# Altium PCB SAVE COPY.PcbDoc
Units mm, origin at the board's own origin, x right, y up, seen from the top; angles counter-clockwise.
Board outline 115.2 x 100.2 mm, 2 copper layers (Top Layer, Bottom Layer), stack 0.98 mm thick; 84 components, 44 nets, 255 pads, 83 vias.
Unrouted connection lines stored in the file: 44.
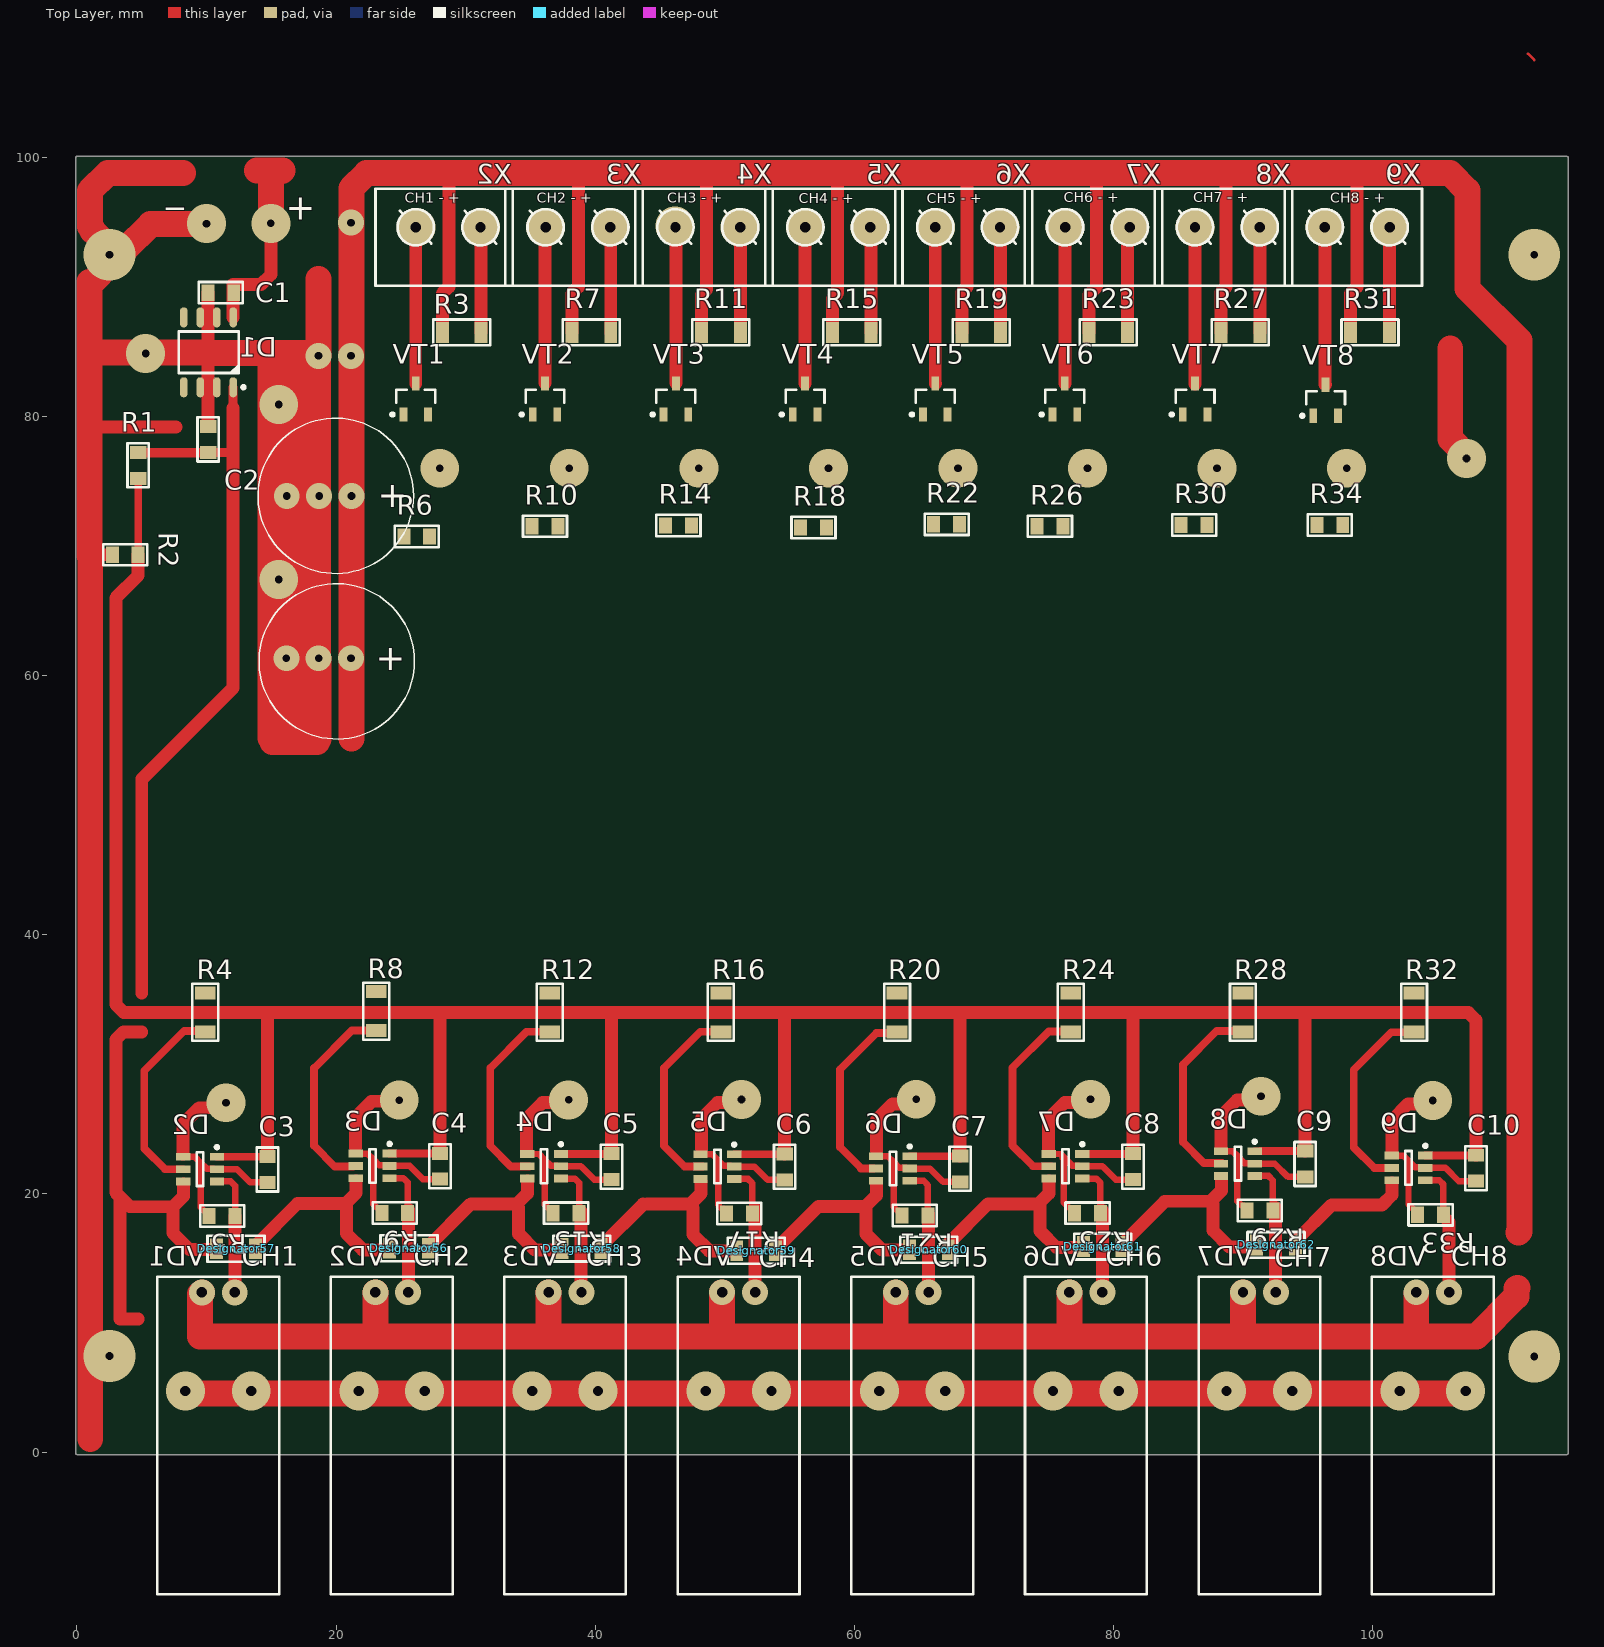
[diagram p0: Top Layer view]
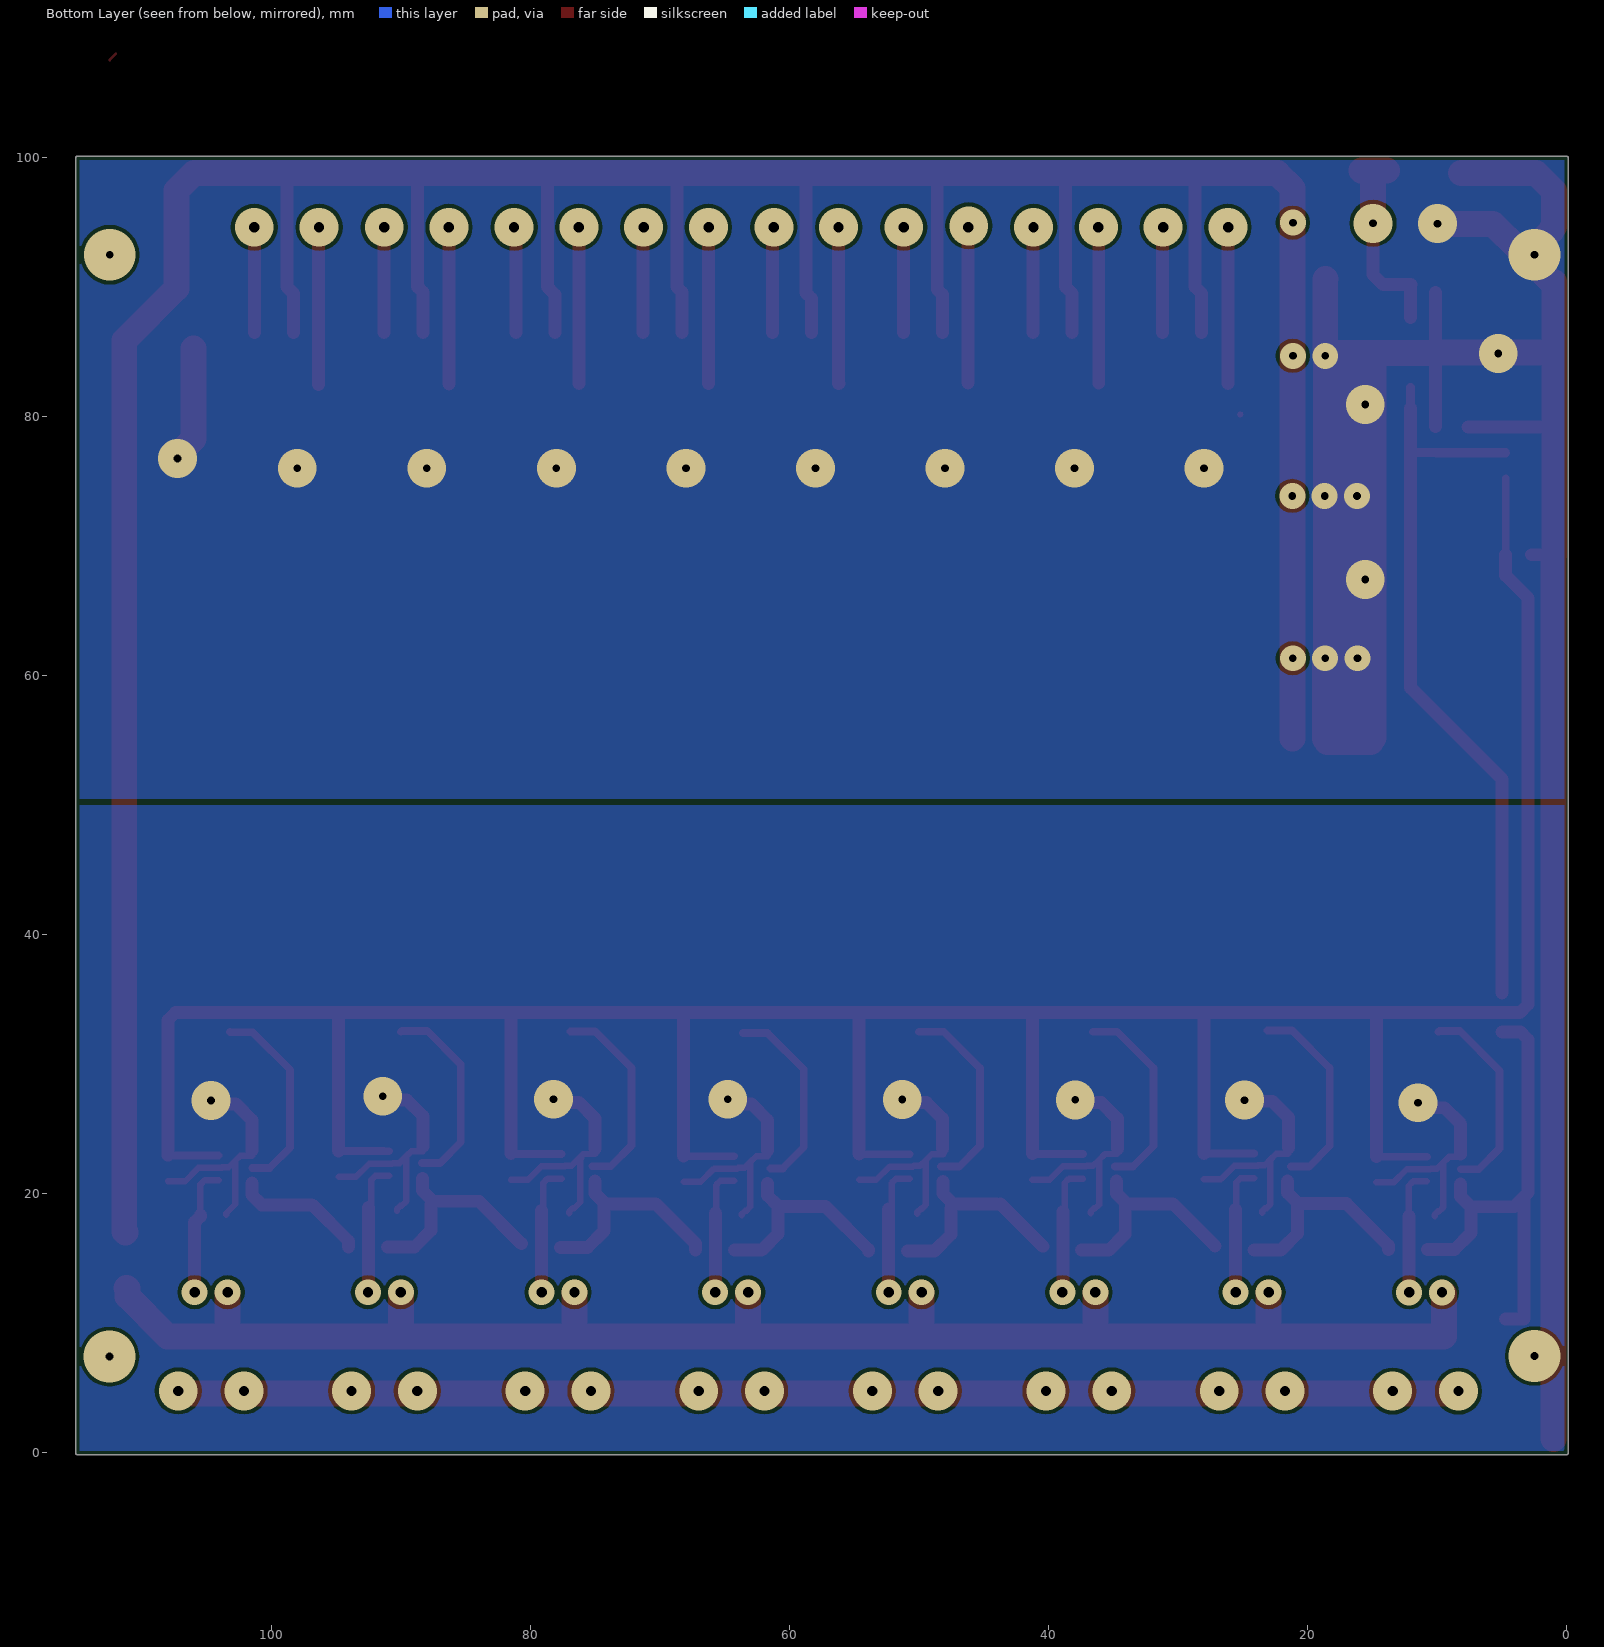
[diagram p1: Bottom Layer view, seen from below]
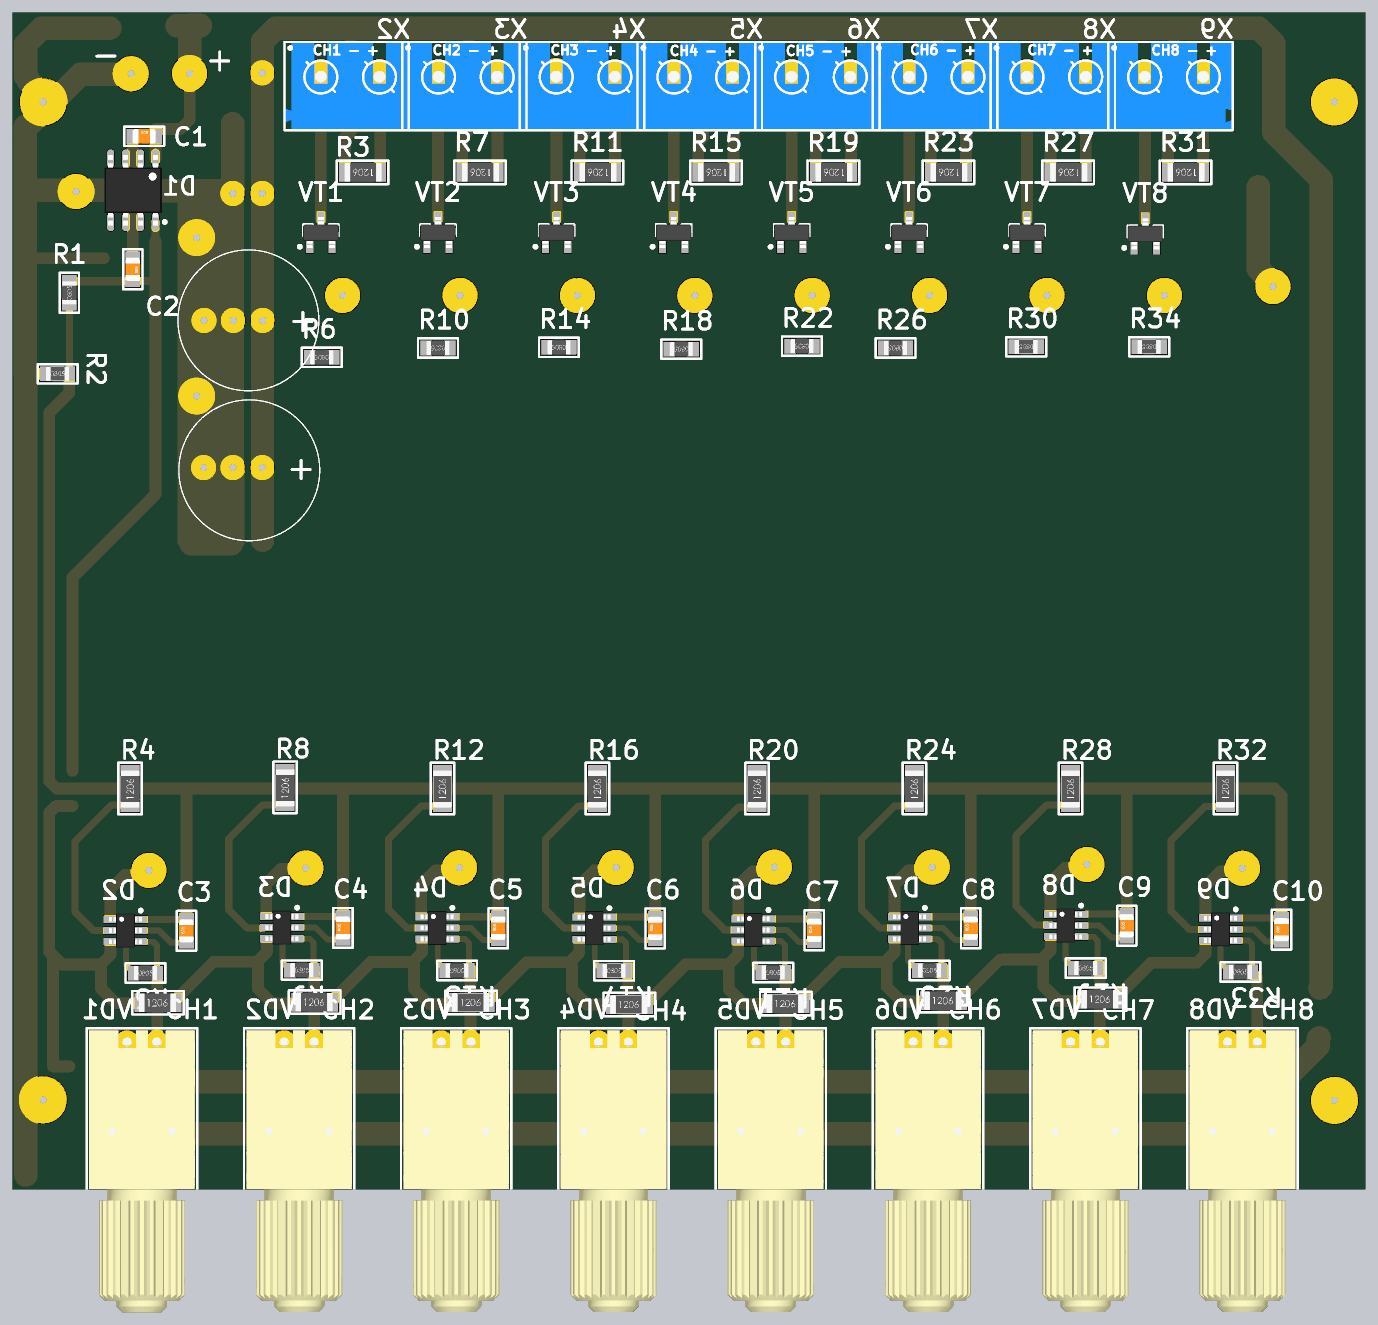
[diagram p2: 3D render of the assembled board from above, using the file's embedded part models]

## Layer stack, top to bottom
Top Solder: solder mask 0.0102, Solder Resist, Dk 3.5
Top Layer: signal copper 0.0356
Dielectric 1: dielectric 0.909, FR-4, Dk 4.8
Bottom Layer: signal copper 0.0356
Bottom Solder: solder mask 0.0102, Solder Resist, Dk 3.5

## Board outline
-0.1,-0.025 ccw(c0,-0.025) 0,-0.125 115,-0.125 ccw(c115,-0.025) 115.032,-0.12 ccw(c115,-0.025) 115.1,-0.025 115.1,99.975 ccw(c115,99.975) 115,100.075 0,100.075 ccw(c0,99.975) -0.1,99.975

## Design rules (kind name [scope] priority, off if disabled: settings)
BoardOutlineClearance [All] p1: gap=0.3 ignorepadtopadclearanceinfootprint=FALSE
Clearance Clearance_MultiLayerPad [OnLayer('Multi-Layer') and IsPad] p1: gap=0.3 ignorepadtopadclearanceinfootprint=FALSE except(0: Arc-Hole Track-Hole SMDPad-Hole THPad-Hole Via-Hole Fill-Hole Poly-Hole Region-Hole Text-Hole)
Clearance Clearance_Polygon [InPolygon] p2: gap=0.2 ignorepadtopadclearanceinfootprint=FALSE except(0: Arc-Hole Track-Hole SMDPad-Hole THPad-Hole Via-Hole Fill-Hole Poly-Hole Region-Hole Text-Hole; 0.3: Arc-Poly Arc-Region Track-Poly Track-Region SMDPad-Poly SMDPad-Region THPad-Poly THPad-Region Via-Poly Via-Region Fill-Poly Fill-Region Poly-Poly Poly-Region Region-Region)
Clearance [All] p3: gap=0.35 ignorepadtopadclearanceinfootprint=FALSE
ComponentClearance [All] p1: gap=-1 collisioncheckmode=3 verticalgap=0.5 showdistances=FALSE
DiffPairsRouting [All] p1: maxlimit=0.4 minlimit=0.2 mostfreqgap=0.2 toplayer_minwidth=0.2 toplayer_maxwidth=0.3 toplayer_prefwidth=0.2 bottomlayer_minwidth=0.2 bottomlayer_maxwidth=0.3 bottomlayer_prefwidth=0.2 maxuncoupledlength=12.7
Height [All] p1: minheight=0 maxheight=50 prefheight=12.7
HoleSize [All] p1: absolutevalues=TRUE maxlimit=10 minlimit=0.2 maxpercent=80.000 minpercent=20.000
HoleToHoleClearance [All] p1: gap=0.3 allowstackedmicrovias=TRUE
MinimumSolderMaskSliver [All] p1: minsoldermaskwidth=0.2
PlaneClearance [All] p1: clearance=0.5
PlaneConnect [All] p1: planeconnectstyle=Relief reliefexpansion=0.5 reliefentries=4 reliefconductorwidth=0.5 reliefairgap=0.3
PolygonConnect PolygonConnect_PadGND [InNet('GND') and IsPad] p1: connectstyle=Relief reliefconductorwidth=0.5 reliefentries=4 polygonreliefangle="90 Angle" airgapwidth=0.3
PolygonConnect PolygonConnect_Via [IsVia] p2: connectstyle=Direct reliefconductorwidth=0.254 reliefentries=4 polygonreliefangle="90 Angle" airgapwidth=0.254
PolygonConnect [All] p3: connectstyle=Relief reliefconductorwidth=0.5 reliefentries=4 polygonreliefangle="90 Angle" airgapwidth=0.3
RoomDefinition SCH1 [InComponentClass('SCH1')] p1: confinementstyle=ConfineIn formatcopy=TRUE lockcomponents=FALSE outline 3.925,13.475 15.75,13.475 15.75,57.975 3.925,57.975
RoomDefinition SCH8 [InComponentClass('SCH8')] p2: confinementstyle=ConfineIn formatcopy=TRUE lockcomponents=FALSE outline 97.2,13.575 109.025,13.575 109.025,58.075 97.2,58.075
RoomDefinition SCH4 [InComponentClass('SCH4')] p3: confinementstyle=ConfineIn formatcopy=TRUE lockcomponents=FALSE outline 43.85,13.675 55.675,13.675 55.675,58.175 43.85,58.175
RoomDefinition SCH2 [InComponentClass('SCH2')] p4: confinementstyle=ConfineIn formatcopy=TRUE lockcomponents=FALSE outline 17.25,13.725 29.075,13.725 29.075,58.225 17.25,58.225
RoomDefinition SCH3 [InComponentClass('SCH3')] p5: confinementstyle=ConfineIn formatcopy=TRUE lockcomponents=FALSE outline 30.475,13.7 42.3,13.7 42.3,58.2 30.475,58.2
RoomDefinition SCH5 [InComponentClass('SCH5')] p6: confinementstyle=ConfineIn formatcopy=TRUE lockcomponents=FALSE outline 57.398,13.525 69.223,13.525 69.223,58.025 57.398,58.025
RoomDefinition SCH6 [InComponentClass('SCH6')] p7: confinementstyle=ConfineIn formatcopy=TRUE lockcomponents=FALSE outline 70.725,13.7 82.55,13.7 82.55,58.2 70.725,58.2
RoomDefinition SCH7 [InComponentClass('SCH7')] p8: confinementstyle=ConfineIn formatcopy=TRUE lockcomponents=FALSE outline 84.025,13.9 95.85,13.9 95.85,58.4 84.025,58.4
RoomDefinition SUP [InComponentClass('SUP')] p9: confinementstyle=ConfineIn formatcopy=TRUE lockcomponents=FALSE outline 23.9,74.675 23.9,100 5.625,100 5.625,74.675
RoomDefinition REF [InComponentClass('REF')] p10: confinementstyle=ConfineIn formatcopy=TRUE lockcomponents=FALSE outline 0.95,80.899 0.95,66.899 6.825,66.899 6.825,80.899
RoutingTopology [All] p1: topology=Vertical
RoutingVias [All] p1: holewidth=0.2 width=0.4 viastyle="Through Hole" minholewidth=0.2 minwidth=0.4 maxholewidth=0.5 maxwidth=1.2
SilkToSolderMaskClearance [IsPad] p1: minsilkscreentomaskgap=0.2 clearancetoexposedcopper=TRUE
SolderMaskExpansion [All] p1: expansion=0.075 istentingtop=FALSE
Width [All] p1: maxlimit=10 minlimit=0.2 preferedwidth=0.2
20 further rules are at their usual default settings.

## Classes and differential pairs
channel class Sch: SCH1 SCH2 SCH3 SCH4 SCH5 SCH6 SCH7 SCH8
component class SUP: C1 C2 D1
component class SCH8: C10 D9 R31 R32 R33 R34 VD8 VT8 X9
component class SCH7: C9 D8 R27 R28 R29 R30 VD7 VT7 X8
component class SCH6: C8 D7 R23 R24 R25 R26 VD6 VT6 X7
component class SCH5: C7 D6 R19 R20 R21 R22 VD5 VT5 X6
component class SCH4: C6 D5 R15 R16 R17 R18 VD4 VT4 X5
component class SCH3: C5 D4 R11 R12 R13 R14 VD3 VT3 X4
component class SCH2: C4 D3 R7 R8 R9 R10 VD2 VT2 X3
component class SCH1: C3 D2 R3 R4 R5 R6 VD1 VT1 X2
component class REF: R1 R2

## Components (designator, comment, footprint, x,y, rotation, side; value= is the part's Value field where it differs from the comment)
C1 "Ceramic capacitor, 1μF, X7R, ±10%, 16V, 0805, -55...+125°C" "CAP: 0805" 11.1,89.55 r0 top value=1μF (schematic designator C2)
C2 "Ceramic capacitor, 0.1μF, X7R, ±10%, 16V, 0805, -55...+125°C" "CAP: 0805" 10.125,78.225 r270 top value=0.1μF (schematic designator C3)
C3 "Ceramic capacitor, 1μF, X7R, ±10%, 16V, 0805, -55...+125°C" "CAP: 0805" 14.7,21.875 r90 top value=1μF (schematic designator C1)
C4 "Ceramic capacitor, 1μF, X7R, ±10%, 16V, 0805, -55...+125°C" "CAP: 0805" 28.025,22.125 r90 top value=1μF (schematic designator C1)
C5 "Ceramic capacitor, 1μF, X7R, ±10%, 16V, 0805, -55...+125°C" "CAP: 0805" 41.25,22.1 r90 top value=1μF (schematic designator C1)
C6 "Ceramic capacitor, 1μF, X7R, ±10%, 16V, 0805, -55...+125°C" "CAP: 0805" 54.625,22.075 r90 top value=1μF (schematic designator C1)
C7 "Ceramic capacitor, 1μF, X7R, ±10%, 16V, 0805, -55...+125°C" "CAP: 0805" 68.173,21.925 r90 top value=1μF (schematic designator C1)
C8 "Ceramic capacitor, 1μF, X7R, ±10%, 16V, 0805, -55...+125°C" "CAP: 0805" 81.5,22.1 r90 top value=1μF (schematic designator C1)
C9 "Ceramic capacitor, 1μF, X7R, ±10%, 16V, 0805, -55...+125°C" "CAP: 0805" 94.8,22.3 r90 top value=1μF (schematic designator C1)
C10 "Ceramic capacitor, 1μF, X7R, ±10%, 16V, 0805, -55...+125°C" "CAP: 0805" 107.975,21.975 r90 top value=1μF (schematic designator C1)
D1 "L78L05ABD" 8-SOIC 10.15,84.95 r90 top (schematic designator D2)
D2 "TLV3501" SOT23-6 9.5,21.9 r180 top (schematic designator D1)
D3 "TLV3501" SOT23-6 22.825,22.15 r180 top (schematic designator D1)
D4 "TLV3501" SOT23-6 36.05,22.125 r180 top (schematic designator D1)
D5 "TLV3501" SOT23-6 49.425,22.1 r180 top (schematic designator D1)
D6 "TLV3501" SOT23-6 62.973,21.95 r180 top (schematic designator D1)
D7 "TLV3501" SOT23-6 76.3,22.125 r180 top (schematic designator D1)
D8 "TLV3501" SOT23-6 89.6,22.325 r180 top (schematic designator D1)
D9 "TLV3501" SOT23-6 102.775,22 r180 top (schematic designator D1)
Designator56 "Comment" "RES: 1206" 25.625,15.8 r0 top
Designator57 "Comment" "RES: 1206" 12.275,15.75 r0 top
Designator58 "Comment" "RES: 1206" 38.95,15.775 r0 top
Designator59 "Comment" "RES: 1206" 52.425,15.6 r0 top
Designator60 "Comment" "RES: 1206" 65.75,15.675 r0 top
Designator61 "Comment" "RES: 1206" 79.175,15.925 r0 top
Designator62 "Comment" "RES: 1206" 92.55,16.05 r0 top
R1 "Resistor film, 27k, ±5%, 0805, 0.125W, -55...+125°C" "RES: 0805" 4.725,76.224 r90 top value=27k (schematic designator R5)
R2 "Resistor film, 1k, ±5%, 0805, 0.125W, -55...+125°C" "RES: 0805" 3.725,69.325 r0 top value=1k (schematic designator R6)
R3 "Resistor film, 100R, ±5%, 1206, 0.25W, -55...+125°C" "RES: 1206" 29.7,86.481 r180 top value=100R (schematic designator R1)
R4 "Resistor film, 100R, ±5%, 1206, 0.25W, -55...+125°C" "RES: 1206" 9.9,34 r90 top value=100R (schematic designator R2)
R5 "Resistor film, 100R, ±5%, 0805, 0.125W, -55...+125°C" "RES: 0805" 11.2,18.275 r0 top value=100R (schematic designator R3)
R6 "Resistor film, 100R, ±5%, 0805, 0.125W, -55...+125°C" "RES: 0805" 26.225,70.725 r180 top value=100R (schematic designator R4)
R7 "Resistor film, 100R, ±5%, 1206, 0.25W, -55...+125°C" "RES: 1206" 39.7,86.481 r180 top value=100R (schematic designator R1)
R8 "Resistor film, 100R, ±5%, 1206, 0.25W, -55...+125°C" "RES: 1206" 23.1,34.1 r90 top value=100R (schematic designator R2)
R9 "Resistor film, 100R, ±5%, 0805, 0.125W, -55...+125°C" "RES: 0805" 24.525,18.525 r0 top value=100R (schematic designator R3)
R10 "Resistor film, 100R, ±5%, 0805, 0.125W, -55...+125°C" "RES: 0805" 36.125,71.525 r180 top value=100R (schematic designator R4)
R11 "Resistor film, 100R, ±5%, 1206, 0.25W, -55...+125°C" "RES: 1206" 49.7,86.481 r180 top value=100R (schematic designator R1)
R12 "Resistor film, 100R, ±5%, 1206, 0.25W, -55...+125°C" "RES: 1206" 36.5,34 r90 top value=100R (schematic designator R2)
R13 "Resistor film, 100R, ±5%, 0805, 0.125W, -55...+125°C" "RES: 0805" 37.75,18.5 r0 top value=100R (schematic designator R3)
R14 "Resistor film, 100R, ±5%, 0805, 0.125W, -55...+125°C" "RES: 0805" 46.425,71.575 r180 top value=100R (schematic designator R4)
R15 "Resistor film, 100R, ±5%, 1206, 0.25W, -55...+125°C" "RES: 1206" 59.8,86.481 r180 top value=100R (schematic designator R1)
R16 "Resistor film, 100R, ±5%, 1206, 0.25W, -55...+125°C" "RES: 1206" 49.7,34 r90 top value=100R (schematic designator R2)
R17 "Resistor film, 100R, ±5%, 0805, 0.125W, -55...+125°C" "RES: 0805" 51.125,18.475 r0 top value=100R (schematic designator R3)
R18 "Resistor film, 100R, ±5%, 0805, 0.125W, -55...+125°C" "RES: 0805" 56.85,71.425 r180 top value=100R (schematic designator R4)
R19 "Resistor film, 100R, ±5%, 1206, 0.25W, -55...+125°C" "RES: 1206" 69.8,86.481 r180 top value=100R (schematic designator R1)
R20 "Resistor film, 100R, ±5%, 1206, 0.25W, -55...+125°C" "RES: 1206" 63.3,34 r90 top value=100R (schematic designator R2)
R21 "Resistor film, 100R, ±5%, 0805, 0.125W, -55...+125°C" "RES: 0805" 64.673,18.325 r0 top value=100R (schematic designator R3)
R22 "Resistor film, 100R, ±5%, 0805, 0.125W, -55...+125°C" "RES: 0805" 67.125,71.675 r180 top value=100R (schematic designator R4)
R23 "Resistor film, 100R, ±5%, 1206, 0.25W, -55...+125°C" "RES: 1206" 79.6,86.481 r180 top value=100R (schematic designator R1)
R24 "Resistor film, 100R, ±5%, 1206, 0.25W, -55...+125°C" "RES: 1206" 76.7,34 r90 top value=100R (schematic designator R2)
R25 "Resistor film, 100R, ±5%, 0805, 0.125W, -55...+125°C" "RES: 0805" 78,18.5 r0 top value=100R (schematic designator R3)
R26 "Resistor film, 100R, ±5%, 0805, 0.125W, -55...+125°C" "RES: 0805" 75.1,71.525 r180 top value=100R (schematic designator R4)
R27 "Resistor film, 100R, ±5%, 1206, 0.25W, -55...+125°C" "RES: 1206" 89.8,86.481 r180 top value=100R (schematic designator R1)
R28 "Resistor film, 100R, ±5%, 1206, 0.25W, -55...+125°C" "RES: 1206" 90,34 r90 top value=100R (schematic designator R2)
R29 "Resistor film, 100R, ±5%, 0805, 0.125W, -55...+125°C" "RES: 0805" 91.3,18.7 r0 top value=100R (schematic designator R3)
R30 "Resistor film, 100R, ±5%, 0805, 0.125W, -55...+125°C" "RES: 0805" 86.225,71.625 r180 top value=100R (schematic designator R4)
R31 "Resistor film, 100R, ±5%, 1206, 0.25W, -55...+125°C" "RES: 1206" 99.8,86.481 r180 top value=100R (schematic designator R1)
R32 "Resistor film, 100R, ±5%, 1206, 0.25W, -55...+125°C" "RES: 1206" 103.2,34 r90 top value=100R (schematic designator R2)
R33 "Resistor film, 100R, ±5%, 0805, 0.125W, -55...+125°C" "RES: 0805" 104.475,18.375 r0 top value=100R (schematic designator R3)
R34 "Resistor film, 100R, ±5%, 0805, 0.125W, -55...+125°C" "RES: 0805" 96.7,71.625 r180 top value=100R (schematic designator R4)
VD1 "SHF250" "LED: SFH757" 10.91,8.585 r180 top
VD2 "SHF250" "LED: SFH757" 24.295,8.59 r180 top (schematic designator VD1)
VD3 "SHF250" "LED: SFH757" 37.67,8.59 r180 top (schematic designator VD1)
VD4 "SHF250" "LED: SFH757" 51.07,8.59 r180 top (schematic designator VD1)
VD5 "SHF250" "LED: SFH757" 64.47,8.59 r180 top (schematic designator VD1)
VD6 "SHF250" "LED: SFH757" 77.87,8.59 r180 top (schematic designator VD1)
VD7 "SHF250" "LED: SFH757" 91.27,8.59 r180 top (schematic designator VD1)
VD8 "SHF250" "LED: SFH757" 104.645,8.59 r180 top (schematic designator VD1)
VT1 "MOSFET N-channel transistor, 80V, 7A, 9.1nC, 2.5W, 34mOhm, 756pF, 8-TDSON, -55...+150°C" SOT23 26.15,81.35 r90 top
VT2 "MOSFET N-channel transistor, 80V, 7A, 9.1nC, 2.5W, 34mOhm, 756pF, 8-TDSON, -55...+150°C" SOT23 36.125,81.35 r90 top (schematic designator VT1)
VT3 "MOSFET N-channel transistor, 80V, 7A, 9.1nC, 2.5W, 34mOhm, 756pF, 8-TDSON, -55...+150°C" SOT23 46.225,81.35 r90 top (schematic designator VT1)
VT4 "MOSFET N-channel transistor, 80V, 7A, 9.1nC, 2.5W, 34mOhm, 756pF, 8-TDSON, -55...+150°C" SOT23 56.2,81.35 r90 top (schematic designator VT1)
VT5 "MOSFET N-channel transistor, 80V, 7A, 9.1nC, 2.5W, 34mOhm, 756pF, 8-TDSON, -55...+150°C" SOT23 66.25,81.35 r90 top (schematic designator VT1)
VT6 "MOSFET N-channel transistor, 80V, 7A, 9.1nC, 2.5W, 34mOhm, 756pF, 8-TDSON, -55...+150°C" SOT23 76.25,81.35 r90 top (schematic designator VT1)
VT7 "MOSFET N-channel transistor, 80V, 7A, 9.1nC, 2.5W, 34mOhm, 756pF, 8-TDSON, -55...+150°C" SOT23 86.3,81.35 r90 top (schematic designator VT1)
VT8 "MOSFET N-channel transistor, 80V, 7A, 9.1nC, 2.5W, 34mOhm, 756pF, 8-TDSON, -55...+150°C" SOT23 96.375,81.25 r90 top (schematic designator VT1)
X2 "Terminal connector, 2pin, 3.5mm, 300VAC, 10A" "CON: KF301-5.0-2P" 28.418,93.781 r0 top (schematic designator X1)
X3 "Terminal connector, 2pin, 3.5mm, 300VAC, 10A" "CON: KF301-5.0-2P" 38.443,93.781 r0 top (schematic designator X1)
X4 "Terminal connector, 2pin, 3.5mm, 300VAC, 10A" "CON: KF301-5.0-2P" 48.468,93.781 r0 top (schematic designator X1)
X5 "Terminal connector, 2pin, 3.5mm, 300VAC, 10A" "CON: KF301-5.0-2P" 58.493,93.781 r0 top (schematic designator X1)
X6 "Terminal connector, 2pin, 3.5mm, 300VAC, 10A" "CON: KF301-5.0-2P" 68.518,93.781 r0 top (schematic designator X1)
X7 "Terminal connector, 2pin, 3.5mm, 300VAC, 10A" "CON: KF301-5.0-2P" 78.543,93.781 r0 top (schematic designator X1)
X8 "Terminal connector, 2pin, 3.5mm, 300VAC, 10A" "CON: KF301-5.0-2P" 88.568,93.781 r0 top (schematic designator X1)
X9 "Terminal connector, 2pin, 3.5mm, 300VAC, 10A" "CON: KF301-5.0-2P" 98.593,93.781 r0 top (schematic designator X1)

## Footprints (in the part's own frame and the unit in brackets; to place one, negate y for a bottom-side part, rotate by r counter-clockwise, add the part's x,y. Pads: shape width x height; smd on the part's side, far side on the other; paste and mask are expansions set on the pad)
8-SOIC [mm] "pitch 1.27 mm"
  rrect100% 1.55x0.6 smd: 1(-2.7,-1.905) 2(-2.7,-0.635) 3(-2.7,0.635) 4(-2.7,1.905) 5(2.7,1.905) 6(2.7,0.635) 7(2.7,-0.635) 8(2.7,-1.905)
  round 0.7 on Mech1: 28(-2.395,-1.8)
  silkscreen extent -2.82,-2.83 1.61,2.3, body extent -3,-2.45 3,2.45, height 1.75
"CAP: 0805" [mm]
  rect 1x1.25 smd: 1(-1,0) 2(1,0)
  silkscreen extent -1.7,-0.82 1.7,0.82, body extent -1,-0.62 1,0.63, height 0.78
"CON: KF301-5.0-2P" [mm]
  round 1.524 hole 0.8: 1(2.725,0.825) 2(-2.275,0.825)
  round 0.5 on Top Overlay: ""(-4.875,3.3)
  silkscreen extent -5.38,-3.7 5.23,3.8, body extent -5.37,-3.75 5.23,3.85, height 3
"LED: SFH757" [mil]
  round 60 hole 31.5: 1(-50,-150) 2(50,-150) 3(-100,150) 4(100,150)
  silkscreen extent -185,-197 185,768, body extent -177,-189 177,756, height 177
"RES: 0805" [mm]
  rect 1x1.25 smd: 1(-1,0) 2(1,0)
  silkscreen extent -1.7,-0.82 1.7,0.82, body extent -1,-0.6 1,0.6, height 0.44
"RES: 1206" [mm]
  rect 1x1.6 smd: 1(-1.5,0) 2(1.5,0)
  silkscreen extent -2.2,-1 2.2,1, body extent -1.65,-0.8 1.55,0.8, height 0.47
SOT23 [mm]
  rect 1.1x0.6 smd: 1(-1.2,0.95) 2(-1.2,-0.95) 3(1.2,0)
  round 0.5 on Mech1: ""(-0.9,1.1)
  silkscreen extent -1.32,-1.5 0.7,1.92, body extent -1.32,-1.52 1.32,1.52, height 1.12
SOT23-6 [mm] "pitch 0.95 mm"
  rect 1.1x0.6 smd: 1(-1.3,-0.95) 2(-1.3,0) 3(-1.3,0.95) 4(1.3,0.95) 5(1.3,0) 6(1.3,-0.95)
  round 0.5 on Mech1: ""(-1,-1.1)
  silkscreen extent -1.43,-1.82 0.25,1.3, body extent -1.4,-1.45 1.4,1.45, height 1.45

## Part data
C1 C2 C3 C4 C5 C6 C7 C8 C9 C10: library part Ceramic_0805, Manufacturer=Yageo, Package=0805, PartNumber=CC0805KRX7R7BB104, Temperature=-55...+125°C, Tolerance=±10%, TypeCapacitor="Ceramic capacitor", TypeDielectric=X7R, Voltage=16V, HelpURL=https://www.digikey.com/product-detail/en/yageo/CC0805KRX7R7BB104/311-1142-1-ND/303052
  C1 C3 C4 C5 C6 C7 C8 C9 C10: ValueManufacturerPartNumber="Ceramic capacitor, 1μF, X7R, ±10%, 16V, 0805, -55...+125°C"
  C2: ValueManufacturerPartNumber="Ceramic capacitor, 0.1μF, X7R, ±10%, 16V, 0805, -55...+125°C"
R1 R2 R5 R6 R9 R10 R13 R14 R17 R18 R21 R22 R25 R26 R29 R30 R33 R34: library part Resistor_0805, Manufacturer=Yageo, Package=0805, PartNumber=RC0805JR-07100RL, Power=0.125W, Temperature=-55...+125°C, Tolerance=±5%, TypeResistor="Resistor film", HelpURL=https://www.digikey.com/product-detail/en/yageo/RC0805JR-07100RL/311-100ARCT-ND/731185
  R1: ValueManufacturerPartNumber="Resistor film, 27k, ±5%, 0805, 0.125W, -55...+125°C"
  R2: ValueManufacturerPartNumber="Resistor film, 1k, ±5%, 0805, 0.125W, -55...+125°C"
  R5 R6 R9 R10 R13 R14 R17 R18 R21 R22 R25 R26 R29 R30 R33 R34: ValueManufacturerPartNumber="Resistor film, 100R, ±5%, 0805, 0.125W, -55...+125°C"
R3 R4 R7 R8 R11 R12 R15 R16 R19 R20 R23 R24 R27 R28 R31 R32: library part Resistor_1206, Manufacturer=Yageo, Package=1206, PartNumber=RC1206JR-07100RL, Power=0.25W, Temperature=-55...+125°C, Tolerance=±5%, TypeResistor="Resistor film", HelpURL=https://www.digikey.com/product-detail/en/yageo/RC1206JR-07100RL/311-100ERCT-ND/732153, ValueManufacturerPartNumber="Resistor film, 100R, ±5%, 1206, 0.25W, -55...+125°C"
VT1 VT2 VT3 VT4 VT5 VT6 VT7 VT8: library part MOSFET_N_132, CurrentDS=7A, InputCapacitor=756pF, Manufacturer="Infineon Technologies", MaxPower=2.5W, Package=8-TDSON, PartNumber=IRLM2803, Temperature=-55...+150°C, VoltageDS=80V, GateCharge=9.1nC, HelpURL=https://www.digikey.com/product-detail/en/infineon-technologies/BSC340N08NS3GATMA1/BSC340N08NS3GATMA1TR-ND/2080655, RDS=34mOhm, TypeTransistor="MOSFET N-channel transistor", ValueManufacturerPartNumber="MOSFET N-channel transistor, 80V, 7A, 9.1nC, 2.5W, 34mOhm, 756pF, 8-TDSON, -55...+150°C"
X2 X3 X4 X5 X6 X7 X8 X9: library part Connector_terminal_2pin, CurrentMax=10A, Manufacturer=Degson, PartNumber=DG350-3.5-02P-14, VoltageMax=300VAC, CommentText="\"Разъем\"", HelpURL=https://www.chipdip.ru/product/dg350-3.5-02p-12, Multichannel=2pin, Pitch=3.5mm, TypeConnector="Terminal connector", ValueManufacturerPartNumber="Terminal connector, 2pin, 3.5mm, 300VAC, 10A"

## Via types
v1: diameter 3, hole 0.6, Top Layer to Bottom Layer, 54 vias
v2: diameter 2, hole 0.6, Top Layer to Bottom Layer, 25 vias
v3: diameter 4, hole 0.6, Top Layer to Bottom Layer, 4 vias

## Nets (pads, with @x,y where several pads share a name; then routed paths per layer and width w, separated by ;. In a path a pad name is that pad's centre, name@x,y a point inside that pad or via, vN(x,y) a via of type N, cw(c..) or ccw(c..) an arc to the next point about the centre after c; other vN are vias at no path point)
GND: C1.1 C2.1 C3.1 C4.1 C5.1 C6.1 C7.1 C8.1 C9.1 C10.1 D1.2 D1.3 D1.6 D1.7 D2.2 D2.6 D3.2 D3.6 D4.2 D4.6 D5.2 D5.6 D6.2 D6.6 D7.2 D7.6 D8.2 D8.6 D9.2 D9.6 R2.1 R5.1 R6.1 R9.1 R10.1 R13.1 R14.1 R17.1 R18.1 R21.1 R22.1 R25.1 R26.1 R29.1 R30.1 R33.1 R34.1 VT1.2 VT2.2 VT3.2 VT4.2 VT5.2 VT6.2 VT7.2 VT8.2 | length 325.4
  Top Layer w0.5: D2.6 8.205,22.845 9.106,22.845 9.554,22.398 ; R5.1 10.2,18.4 9.95,18.65 9.847,18.65 9.554,18.943 9.554,22.398 ; C3.1 13.375,20.875 12.35,21.9 10.55,21.9 10.5,21.95 10.254,21.95 10.001,21.95 9.554,22.398 ; D3.6 21.53,23.095 22.431,23.095 22.879,22.648 ; R9.1 23.525,18.65 23.275,18.9 23.172,18.9 22.879,19.193 22.879,22.648 ; C4.1 26.7,21.125 25.675,22.15 23.875,22.15 23.825,22.2 23.579,22.2 23.326,22.2 22.879,22.648 ; D4.6 34.755,23.07 35.656,23.07 36.104,22.623 ; R13.1 36.75,18.625 36.5,18.875 36.397,18.875 36.104,19.168 36.104,22.623 ; C5.1 39.925,21.1 38.9,22.125 37.1,22.125 37.05,22.175 36.804,22.175 36.551,22.175 36.104,22.623 ; D5.6 48.13,23.045 49.031,23.045 49.479,22.598 ; R17.1 50.125,18.6 49.875,18.85 49.772,18.85 49.479,19.143 49.479,22.598 ; C6.1 53.3,21.075 52.275,22.1 50.475,22.1 50.425,22.15 50.179,22.15 49.926,22.15 49.479,22.598 ; D6.6 61.678,22.895 62.579,22.895 63.027,22.448 ; R21.1 63.673,18.45 63.423,18.7 63.32,18.7 63.027,18.993 63.027,22.448 ; C7.1 66.848,20.925 65.823,21.95 64.023,21.95 63.973,22 63.727,22 63.475,22 63.027,22.448 ; D7.6 75.005,23.07 75.906,23.07 76.801,22.175 77.054,22.175 77.3,22.175 77.35,22.125 79.15,22.125 80.175,21.1 C8.1 ; 76.088,22.889 76.088,22.736 76.15,22.674 76.15,19.35 76.625,18.875 76.75,18.875 77,18.625 R25.1 ; D8.6 88.305,23.27 89.206,23.27 89.568,22.908 ; R29.1 90.3,18.825 90.05,19.075 89.925,19.075 89.568,19.432 89.568,22.908 ; C9.1 93.475,21.3 92.45,22.325 90.65,22.325 90.6,22.375 90.354,22.375 90.101,22.375 89.568,22.908 ; D9.6 101.48,22.945 102.381,22.945 102.775,22.551 ; R33.1 103.475,18.5 102.775,19.2 102.775,22.551 ; C10.1 106.65,20.975 105.625,22 103.825,22 103.775,22.05 103.529,22.05 103.276,22.05 102.775,22.551
  Top Layer w1: 0.975,69.275 1.025,69.325 R2.1 ; 0.975,79.3 1.1,79.175 7.65,79.175 ; D2.6@8.2,23.05 8.2,25.4 9.442,26.642 11.117,26.642 v1(11.5,27.025) ; C2.1 10.125,84.9 C1.1@10.125,89.55 ; 21.5,23.55 21.5,25.9 22.742,27.142 v1@24.417,27.142 ; 34.7,23.45 34.7,25.8 35.942,27.042 v1@37.617,27.042 ; 48.2,23.45 48.2,25.8 49.442,27.042 v1@51.117,27.042 ; 61.7,23.35 61.7,25.7 62.942,26.942 v1@64.617,26.942 ; 75,23.45 75,25.8 76.242,27.042 v1@77.917,27.042 ; 88.3,23.65 88.3,26 89.542,27.242 v1@91.217,27.242 ; 101.5,23.35 101.5,25.7 102.742,26.942 v1@104.417,26.942
  Top Layer w2: 0.975,69.275 0.975,79.3 0.975,85.95 ; 0.975,84.925 0.975,85.95 ; 0.975,90.4 0.975,85.95 ; 1.025,1.075 1.025,69.325 ; 1.2,90.4 2.5,91.7 v3(2.5,92.475) ; 8.175,98.775 2.371,98.775 1,97.404 1,94.647 1.2,94.447 1.2,94.317 2.5,93.016 v3(2.5,92.475) ; v1@9.843,94.631 9.789,94.631 9.57,94.85 5.687,94.85 3.694,92.858 2.883,92.858 v3(2.5,92.475) ; v1@9.951,94.837 v1@10.005,94.783 ; 10.125,84.9 18.43,84.9 v2(18.649,84.682) 18.649,90.601 18.625,90.625 ; 14.925,55.175 14.925,84.65 ; 18.656,55.106 v2(18.656,61.334)
  other v1: 104.65,27.2 24.875,27.225 37.95,27.25 51.3,27.275 64.775,27.3 78.225,27.3 91.4,27.525 15.568,67.424 28,76 38,76 48,76 58,76 68,76 78,76 88,76 98,76 15.568,80.924 5.3,84.85 9.988,94.88
  other v2: 16.156,61.334 16.194,73.866 18.694,73.866
NetC2_2: C2.2 D1.1 D2.4 D3.4 D4.4 D5.4 D6.4 D7.4 D8.4 D9.4 Designator56.1 Designator56.2 Designator57.1 Designator57.2 Designator58.1 Designator58.2 Designator59.1 Designator59.2 Designator60.1 Designator60.2 Designator61.1 Designator61.2 Designator62.1 Designator62.2 R1.2 | length 191.4
  Top Layer w0.5: R1.2 R1.2@4.75,77.2 ; 7.625,77.2 7.65,77.175 7.675,77.2 ; C2.2@10.1,77.2 C2.2
  Top Layer w0.7: R1.2@4.75,77.2 7.625,77.2 ; 7.675,77.2 C2.2@10.1,77.2 ; C2.2 11.525,77.225 ; 12.055,80.65 D1.1
  Top Layer w1: 5,32.5 3.586,32.5 3,31.914 3,20.086 4.086,19 7.414,19 ; 5,35.5 5,52 12.055,59.055 12.055,80.65 ; D2.4@8.225,20.75 8.225,19.811 7.414,19 ; Designator57.1@10.775,15.7 8.675,15.7 7.414,16.961 7.414,19 ; Designator57.2@13.775,15.7 13.775,16 17.025,19.25 20.739,19.25 21.55,20.061 D3.4@21.55,21 ; 20.789,18.975 20.789,16.936 22.05,15.675 Designator56.1@24.15,15.675 ; Designator56.2@27.15,15.975 30.4,19.225 ; 30.636,19.225 33.964,19.225 34.775,20.036 D4.4@34.775,20.975 ; 34.089,18.95 34.089,16.911 35.35,15.65 Designator58.1@37.45,15.65 ; Designator58.2@40.45,15.95 43.7,19.2 ; 44.011,19.2 47.339,19.2 48.15,20.011 D5.4@48.15,20.95 ; 47.539,18.9 47.539,16.861 48.8,15.6 Designator59.1@50.9,15.6 ; Designator59.2@53.9,15.6 53.9,15.7 57.233,19.033 57.721,19.033 57.738,19.029 60.867,19.029 61.698,19.861 D6.4@61.698,20.8 ; 60.889,18.95 60.889,16.911 62.15,15.65 Designator60.1@64.25,15.65 ; Designator60.2@67.25,15.65 67.25,16.15 70.325,19.225 74.214,19.225 75.025,20.036 D7.4@75.025,20.975 ; 74.339,19.15 74.339,17.111 75.6,15.85 Designator61.1@77.7,15.85 ; Designator61.2@80.7,16.15 83.95,19.4 ; 84.186,19.425 87.514,19.425 88.325,20.236 D8.4@88.325,21.175 ; 87.689,19.2 87.689,17.161 88.95,15.9 Designator62.1@91.05,15.9 ; Designator62.2@94.05,15.9 94.05,16.35 96.85,19.15 100.739,19.15 101.5,19.911 D9.4@101.5,20.85
NetC3_2: C3.2 C4.2 C5.2 C6.2 C7.2 C8.2 C9.2 C10.2 D2.1 D3.1 D4.1 D5.1 D6.1 D7.1 D8.1 D9.1 R1.1 R2.2 | length 265.4
  Top Layer w0.6: R2.2 R1.1 ; D2.1 14.675,22.85 C3.2 ; D3.1 28,23.1 C4.2 ; D4.1 41.225,23.075 C5.2 ; D5.1 54.6,23.05 C6.2 ; D6.1 68.148,22.9 C7.2 ; D7.1 81.475,23.075 C8.2 ; D8.1 91.326,23.275 91.351,23.3 C9.2 ; 94.7,34 94.8,33.9 ; D9.1 107.95,22.95 C10.2
  Top Layer w1: R2.2 4.725,67.725 3,66 3,34.611 3.611,34 14.675,34 ; C3.2 14.7,33.975 14.675,34 ; C4.2 28.025,34 ; C5.2 41.25,33.65 41.6,34 ; C6.2 54.625,33.9 54.525,34 ; C7.2 68.173,33.777 67.95,34 ; C8.2 81.5,33.825 81.675,34 ; C9.2 94.8,33.9 ; C10.2 107.975,33.414 107.389,34 94.7,34 81.675,34 ; 14.675,34 28.025,34 ; 28.025,34 41.6,34 ; 41.6,34 54.525,34 ; 54.525,34 67.95,34 ; 67.95,34 81.675,34
NetD2_3: D2.3 R5.2 VD1.1 | length 9.8
  Top Layer w0.5: D2.3 11.875,20.95 12.2,20.625 R5.2 ; VD1.1@12.178,12.397 v2(12.18,12.395)
  Top Layer w1: VD1.1@12.178,12.397 12.1,12.475 12.2,12.575 R5.2
NetD2_5: D2.5 R4.1 | length 15.7
  Top Layer w0.6: D2.5 7.774,21.9 6.8,21.9 5.2,23.5 5.2,29.5 8.275,32.575 9.825,32.575 R4.1
NetD3_3: D3.3 R9.2 VD2.1 | length 10.3
  Top Layer w0.5: D3.3 25.2,21.2 25.525,20.875 R9.2
  Top Layer w1: v2(25.565,12.4) 25.575,12.41 R9.2@25.575,18.775
NetD3_5: D3.5 R8.1 | length 15.7
  Top Layer w0.6: D3.5@21.3,22.1 20.874,22.1 19.9,22.1 18.3,23.7 18.3,29.7 21.2,32.6 R8.1
NetD4_3: D4.3 R13.2 VD3.1 | length 10.2
  Top Layer w0.5: D4.3 38.425,21.175 38.75,20.85 R13.2
  Top Layer w1: R13.2@38.9,18.65 38.9,12.44 v2(38.94,12.4)
NetD4_5: D4.5 R12.1 | length 15.5
  Top Layer w0.6: D4.5@34.9,22.1 34.474,22.1 33.5,22.1 31.9,23.7 31.9,29.7 34.7,32.5 R12.1@36.6,32.5
NetD5_3: D5.3 R17.2 VD4.1 | length 10.3
  Top Layer w0.5: D5.3 51.8,21.15 52.125,20.825 R17.2
  Top Layer w1: v2(52.34,12.4) 52.35,12.41 R17.2@52.35,18.825
NetD5_5: D5.5 R16.1 | length 15.5
  Top Layer w0.6: D5.5@48.3,22.1 47.874,22.1 46.9,22.1 45.3,23.7 45.3,29.7 48.1,32.5 R16.1@50,32.5
NetD6_3: D6.3 R21.2 VD5.1 | length 10
  Top Layer w0.5: D6.3 65.348,21 65.673,20.675 R21.2
  Top Layer w1: R21.2@65.725,18.525 65.725,12.465 65.7,12.44 v2(65.74,12.4)
NetD6_5: D6.5 R20.1 | length 15.1
  Top Layer w0.6: 60.5,21.95 D6.5@61.474,21.95 ; 60.5,22 58.9,23.6 58.9,29.6 61.7,32.4 R20.1@63.6,32.4
NetD7_3: D7.3 R25.2 VD6.1 | length 10.2
  Top Layer w0.5: D7.3 78.675,21.175 79,20.85 R25.2
  Top Layer w1: v2(79.14,12.4) 79.15,12.41 R25.2@79.15,18.7
NetD7_5: D7.5 R24.1 | length 15.5
  Top Layer w0.6: D7.5@75.2,22.125 74.774,22.125 73.8,22.125 72.2,23.725 72.2,29.725 75,32.525 R24.1@76.9,32.525
NetD8_3: D8.3 R29.2 VD7.1 | length 10.4
  Top Layer w0.5: D8.3 91.975,21.375 92.3,21.05 R29.2
  Top Layer w1: R29.2@92.5,18.925 92.5,12.44 v2(92.54,12.4)
NetD8_5: D8.5 R28.1 | length 15.4
  Top Layer w0.6: D8.5@88.375,22.375 87.949,22.375 86.975,22.375 85.375,23.975 85.375,29.975 87.975,32.575 89.925,32.575 R28.1
NetD9_3: D9.3 R33.2 VD8.1 | length 10
  Top Layer w0.5: D9.3 105.15,21.05 105.475,20.725 R33.2
  Top Layer w1: R33.2 105.475,18.25 105.915,17.81 v2(105.915,12.4)
NetD9_5: D9.5 R32.1 | length 15.4
  Top Layer w0.6: D9.5 100.125,22 98.55,23.575 98.55,29.575 101.45,32.475 103.175,32.475 R32.1
NetR3_1: R3.1 X2.1 | length 8.1
  Top Layer w1: X2.1 31.2,94.549 R3.1
  other v1: 31.163,94.605
NetR4_2: R4.2 R6.2 VT1.1
NetR7_1: R7.1 X3.1 | length 8.1
  Top Layer w1: X3.1 41.2,94.574 R7.1
  other v1: 41.163,94.605
NetR8_2: R8.2 R10.2 VT2.1
NetR11_1: R11.1 X4.1 | length 8.3
  Top Layer w0.5: X4.1@51.518,94.314 X4.1@51.518,94.581
  Top Layer w1: R11.1 51.2,94.052 51.463,94.314 X4.1@51.518,94.314
  other v1: 51.188,94.605
NetR12_2: R12.2 R14.2 VT3.1
NetR15_1: R15.1 X5.1 | length 8.2
  Top Layer w1: X5.1 61.3,94.524 R15.1
  other v1: 61.213,94.605
NetR16_2: R16.2 R18.2 VT4.1
NetR19_1: R19.1 X6.1 | length 8.1
  Top Layer w0.5: X6.1@71.268,94.289 X6.1@71.268,94.556
  Top Layer w1: X6.1@71.268,94.289 71.3,94.258 R19.1
  other v1: 71.263,94.605
NetR20_2: R20.2 R22.2 VT5.1
NetR23_1: R23.1 X7.1 | length 8.5
  Top Layer w0.5: X7.1@81.368,94.339 X7.1@81.368,94.606
  Top Layer w1: R23.1 81.1,94.438 X7.1
  other v1: 81.263,94.605
NetR24_2: R24.2 R26.2 VT6.1
NetR27_1: R27.1 X8.1 | length 8.4
  Top Layer w0.5: X8.1@91.318,94.314 X8.1@91.318,94.581
  Top Layer w1: X8.1 91.3,94.599 R27.1
  other v1: 91.288,94.605
NetR28_2: R28.2 R30.2 VT7.1
NetR31_1: R31.1 X9.1 | length 8.1
  Top Layer w1: R31.1 101.3,94.588 X9.1
  other v1: 101.313,94.605
NetR32_2: R32.2 R34.2 VT8.1
NetVT1_3: VT1.3 X2.2 | length 12.1
  Top Layer w1: X2.2 26.147,94.602 VT1.3@26.147,82.553
  other v1: 26.163,94.605
NetVT2_3: VT2.3 X3.2 | length 12
  Top Layer w1: VT2.3@36.134,82.584 36.134,94.572 X3.2
  other v1: 36.163,94.605
NetVT3_3: VT3.3 X4.2 | length 12
  Top Layer w1: X4.2 46.222,94.577 VT3.3@46.222,82.578
  other v1: 46.166,94.712
NetVT4_3: VT4.3 X5.2 | length 12.1
  Top Layer w1: VT4.3 56.209,82.559 56.209,94.597 X5.2
  other v1: 56.213,94.605
NetVT5_3: VT5.3 X6.2 | length 12.1
  Top Layer w1: X6.2 66.247,94.602 66.247,82.553 VT5.3
  other v1: 66.263,94.605
NetVT6_3: VT6.3 X7.2 | length 12.1
  Top Layer w1: VT6.3 76.259,82.559 76.259,94.597 X7.2
  other v1: 76.263,94.605
NetVT7_3: VT7.3 X8.2 | length 12.1
  Top Layer w1: X8.2 86.297,94.602 86.297,82.503 VT7.3@86.3,82.5
  other v1: 86.288,94.605
NetVT8_3: VT8.3 X9.2 | length 12.2
  Top Layer w1: X9.2 96.347,94.577 96.347,82.478 VT8.3
  other v1: 96.313,94.605
VCC: C1.2 D1.8 R3.2 R7.2 R11.2 R15.2 R19.2 R23.2 R27.2 R31.2 VD1.2 VD2.2 VD3.2 VD4.2 VD5.2 VD6.2 VD7.2 VD8.2 | length 453.3
  Top Layer w1: D1.8 12.055,90.17 12.05,90.175 14.189,90.175 14.975,90.961 14.975,94.875 ; R3.2 28.2,89.5 28.7,90 28.7,98.775 ; R7.2 38.2,89.5 38.7,90 38.7,98.775 ; R11.2 48.2,89.4 48.6,89.8 48.6,98.775 ; 54.455,98.455 54.775,98.775 ; R15.2 58.3,89.1 58.718,89.518 58.718,98.775 ; R19.2 68.3,89.6 68.7,90 68.7,98.775 ; 74.555,98.505 74.825,98.775 ; R23.2 78.1,89.4 78.7,90 78.7,98.775 ; R27.2 88.3,89.6 88.7,90 88.7,98.775 ; R31.2 98.3,89.5 98.8,90 98.8,98.775
  Top Layer w2: v2(9.64,12.395) 9.5,12.255 9.5,9 22.85,9 ; 21.175,55.15 21.175,61.377 21.175,73.902 21.175,84.727 21.175,95.002 21.175,97.604 22.347,98.775 28.7,98.775 38.7,98.775 48.6,98.775 54.775,98.775 58.718,98.775 68.7,98.775 74.825,98.775 78.7,98.775 88.7,98.775 98.8,98.775 105.983,98.775 107.325,97.434 107.325,89.875 111.35,85.85 111.35,17.1 111.25,17 ; v2(23.025,12.4) 23.025,9.175 22.85,9 ; v2(36.4,12.4) 36.4,9.225 36.175,9 ; v2(49.8,12.4) 49.8,9.2 50,9 ; v2(63.2,12.4) 63.2,9.025 63.225,9 ; v2(76.6,12.4) 76.6,9.075 76.675,9 ; v2(90,12.4) 90,9.1 90.1,9 ; 103.375,9 VD8.2@103.375,12.275 ; 111.175,12.75 111.1,12.675 111.1,12.075 108.025,9 90.1,9 ; 22.85,9 36.175,9 ; 36.175,9 50,9 ; 50,9 63.225,9 ; 63.225,9 76.675,9 ; 76.675,9 90.1,9
  other v2: 103.375,12.4 21.156,61.334 21.194,73.866 21.149,84.682 21.149,94.957
pads on no net: D1.4 D1.5 D1.28 D2. D3. D4. D5. D6. D7. D8. D9. VD1.3 VD1.4 VD2.3 VD2.4 VD3.3 VD3.4 VD4.3 VD4.4 VD5.3 VD5.4 VD6.3 VD6.4 VD7.3 VD7.4 VD8.3 VD8.4 VT1. VT2. VT3. VT4. VT5. VT6. VT7. VT8. X2. X3. X4. X5. X6. X7. X8. X9.
copper on no net: | length 191.1
  Top Layer w0.2: 112,108 112.486,107.514
  Top Layer w1: 3.328,19.597 3.328,10.325 4.728,10.325
  Top Layer w2: 1.375,84.95 10.125,84.95 ; v1@8.275,4.6 v1@107.005,4.6 ; 13.9,98.975 15.875,98.975 ; v1@14.975,94.875 14.975,99 15.875,99 15.825,98.95 ; 15.1,54.85 18.525,54.85 ; 16.75,55.175 16.75,84.65 ; 18.6,61.3 18.6,84.575 ; 106,85.25 106,78.271 107.25,77.021 v1(107.25,76.75)
  other v1: 8.37,4.775 13.45,4.775 21.755,4.78 26.835,4.78 35.13,4.78 40.21,4.78 48.53,4.78 53.61,4.78 61.93,4.78 67.01,4.78 75.33,4.78 80.41,4.78 88.73,4.78 93.81,4.78 102.105,4.78 107.185,4.78 14.963,94.905
  other v3: 112.486,7.431 2.5,7.475 112.475,92.475

## Polygon pours and split planes (outlines as drawn)
no net on Top Layer "NONET_L01_P008" (solid, pour order 8): 115.025,99.975
no net on Top Layer "NONET_L01_P002" (solid, pour order 2): 7.5,25
no net on Top Layer "NONET_L01_P001" (solid, pour order 1): 15.4,83.7
no net on Top Layer "NONET_L01_P000" (solid, pour order 0): 15.4,83.5
GND on Bottom Layer "GND_L02_P009" (solid, pour order 9): 115.025,99.975 115,99.95 115,50.5 0,50.5 0,100
GND on Bottom Layer "GND_L02_P005" (solid, pour order 5): 115.125,-0.15 115.075,-0.1 -0.075,-0.1 -0.075,50 115.099,50

## Silkscreen, mask and mechanical layers (free items; w line width, h text height)
Top Overlay:
  circle w0.1: c20.05,61.1 r6
  circle w0.1: c19.975,73.875 r6
  text "_" at 6.904,96.562 h2
  text "CH6 - +" at 76.179,96.529 h0.8
  text "CH7 - +" at 86.177,96.524 h0.8
  text "CH1 - +" at 25.304,96.504 h0.8
  text "CH2 - +" at 35.504,96.504 h0.8
  text "CH3 - +" at 45.554,96.504 h0.8
  text "CH8 - +" at 96.727,96.499 h0.8
  text "CH4 - +" at 55.704,96.454 h0.8
  text "CH5 - +" at 65.604,96.454 h0.8
  text "+" at 16.129,95.196 h2
  text "+" at 23.204,72.996 h2
  text "+" at 23.054,60.396 h2
  text "CH1" at 12.704,14.454 h1.52
  text "CH2" at 26.01,14.434 h1.52
  text "CH3" at 39.31,14.434 h1.52
  text "CH6" at 79.41,14.434 h1.52
  text "CH8" at 106.06,14.434 h1.52
  text "CH5" at 66.01,14.384 h1.52
  text "CH7" at 92.46,14.384 h1.52
  text "CH4" at 52.61,14.334 h1.52
Border:
  lines w0.2: 90,-0.025 115,-0.025 ; 115,-0.025 115,99.975 0,99.975 0,-0.025 115,-0.025

## Dimensions
2.475,92.15 to 112.475,90.575 on Size
112.475,92.45 to 112.5,7.475 on Size
2.5,7.475 to 112.5,7.475 on Size
0,-0.025 to 0,99.975 on Size
0,99.975 to 115,99.975 on Size
2.5,92.475 to 2.5,7.475 on Size